# Altium PCB IND-SMD_3P-L27.9-W19.7-P10.43-LS27.9-BL-A.pcbdoc
Units mm, origin at the board's own origin, x right, y up, seen from the top; angles counter-clockwise.
Board outline 40.68 x 40.21 mm, 2 copper layers (Top Layer, Bottom Layer); 1 components, 0 nets, 3 pads, 0 vias.
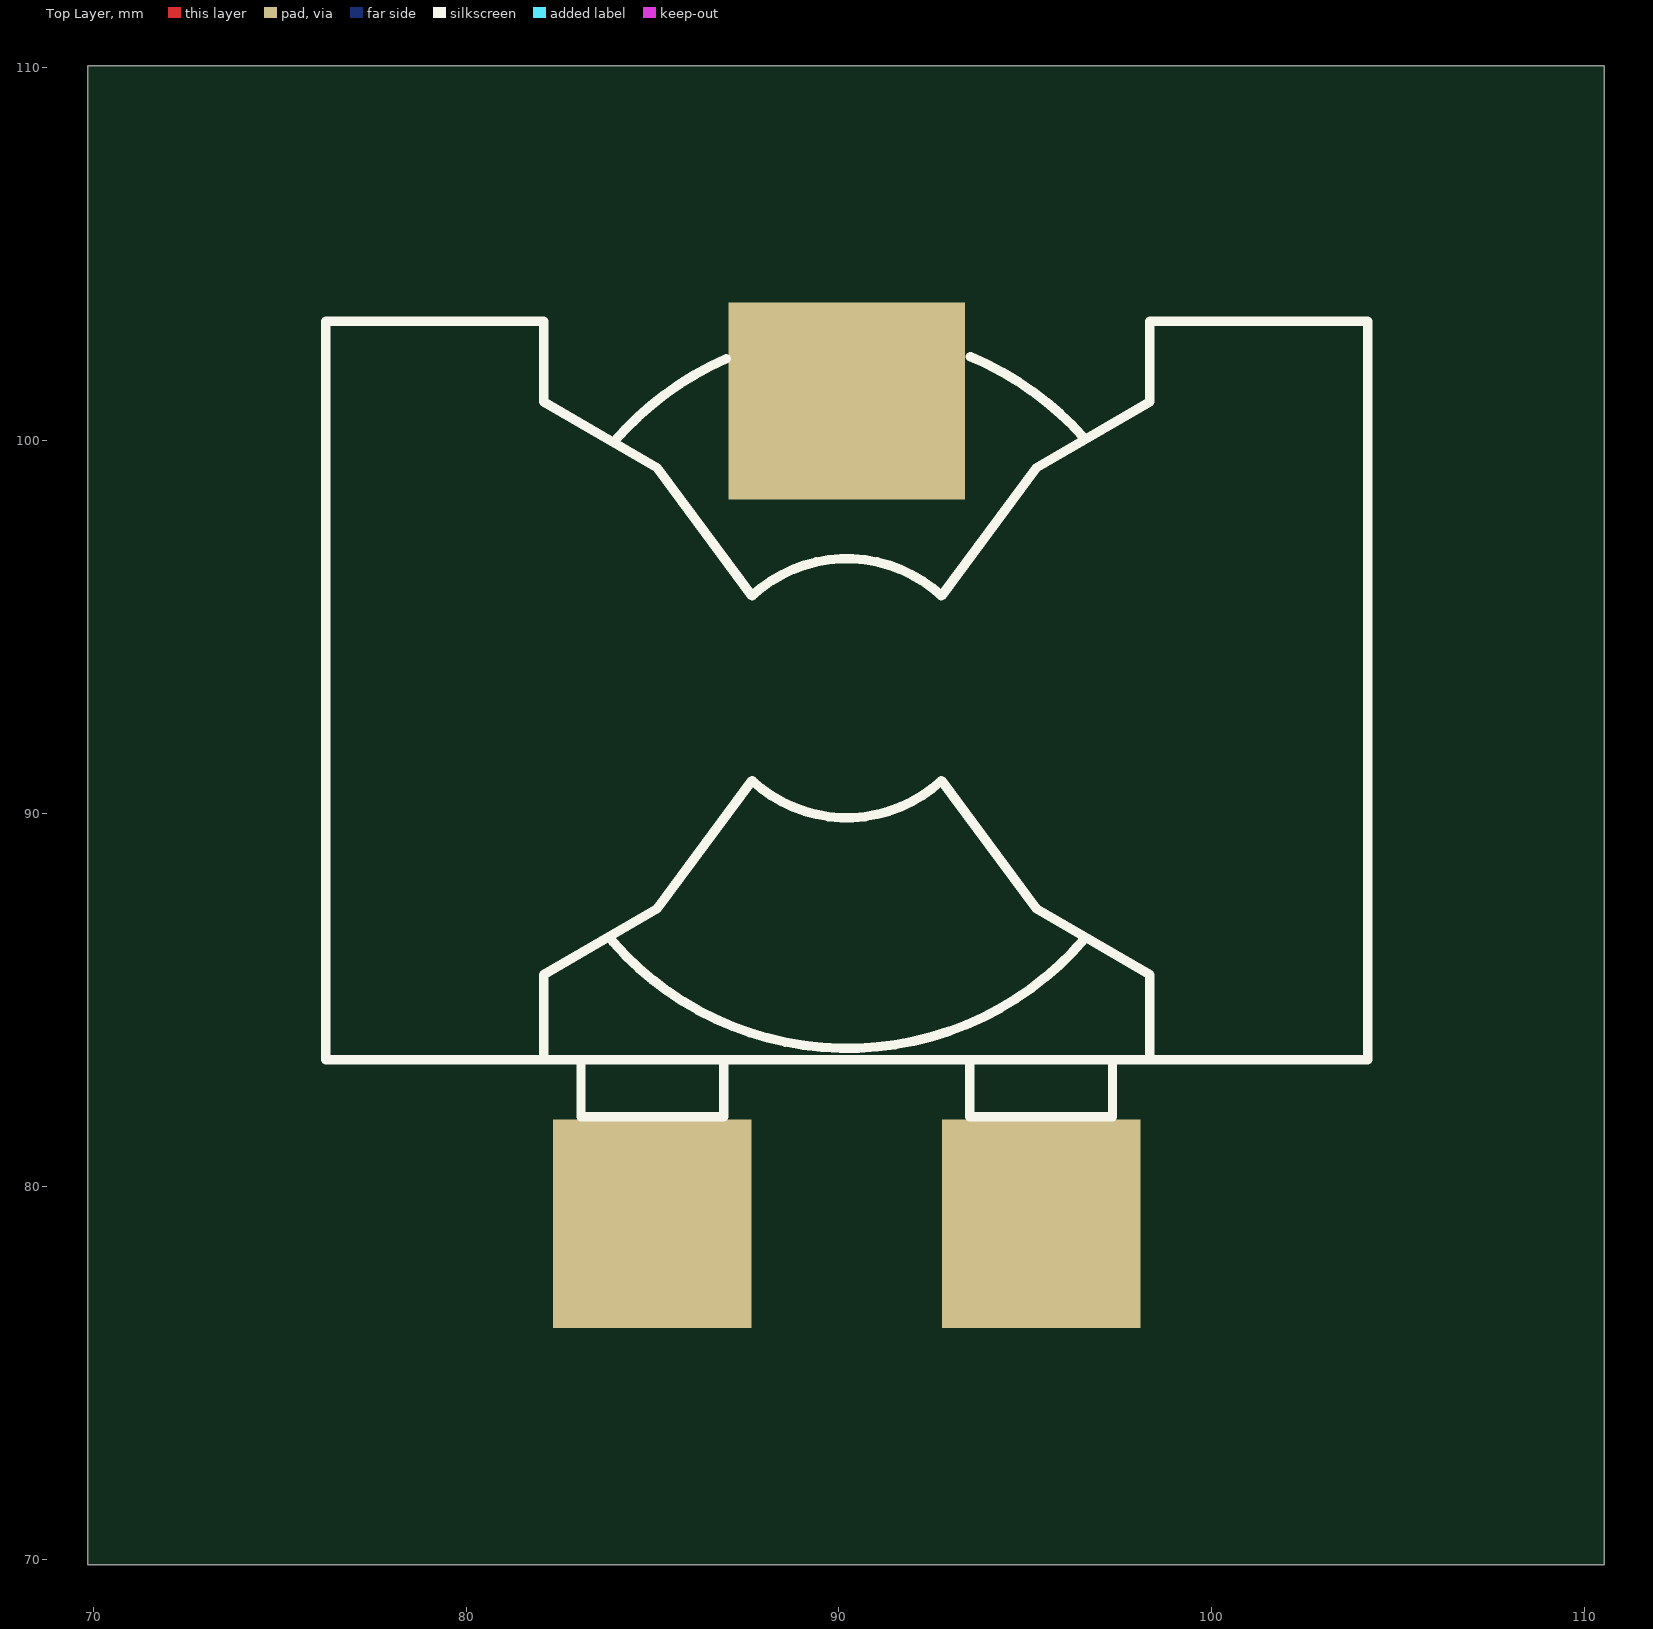
[diagram p0: Top Layer view]
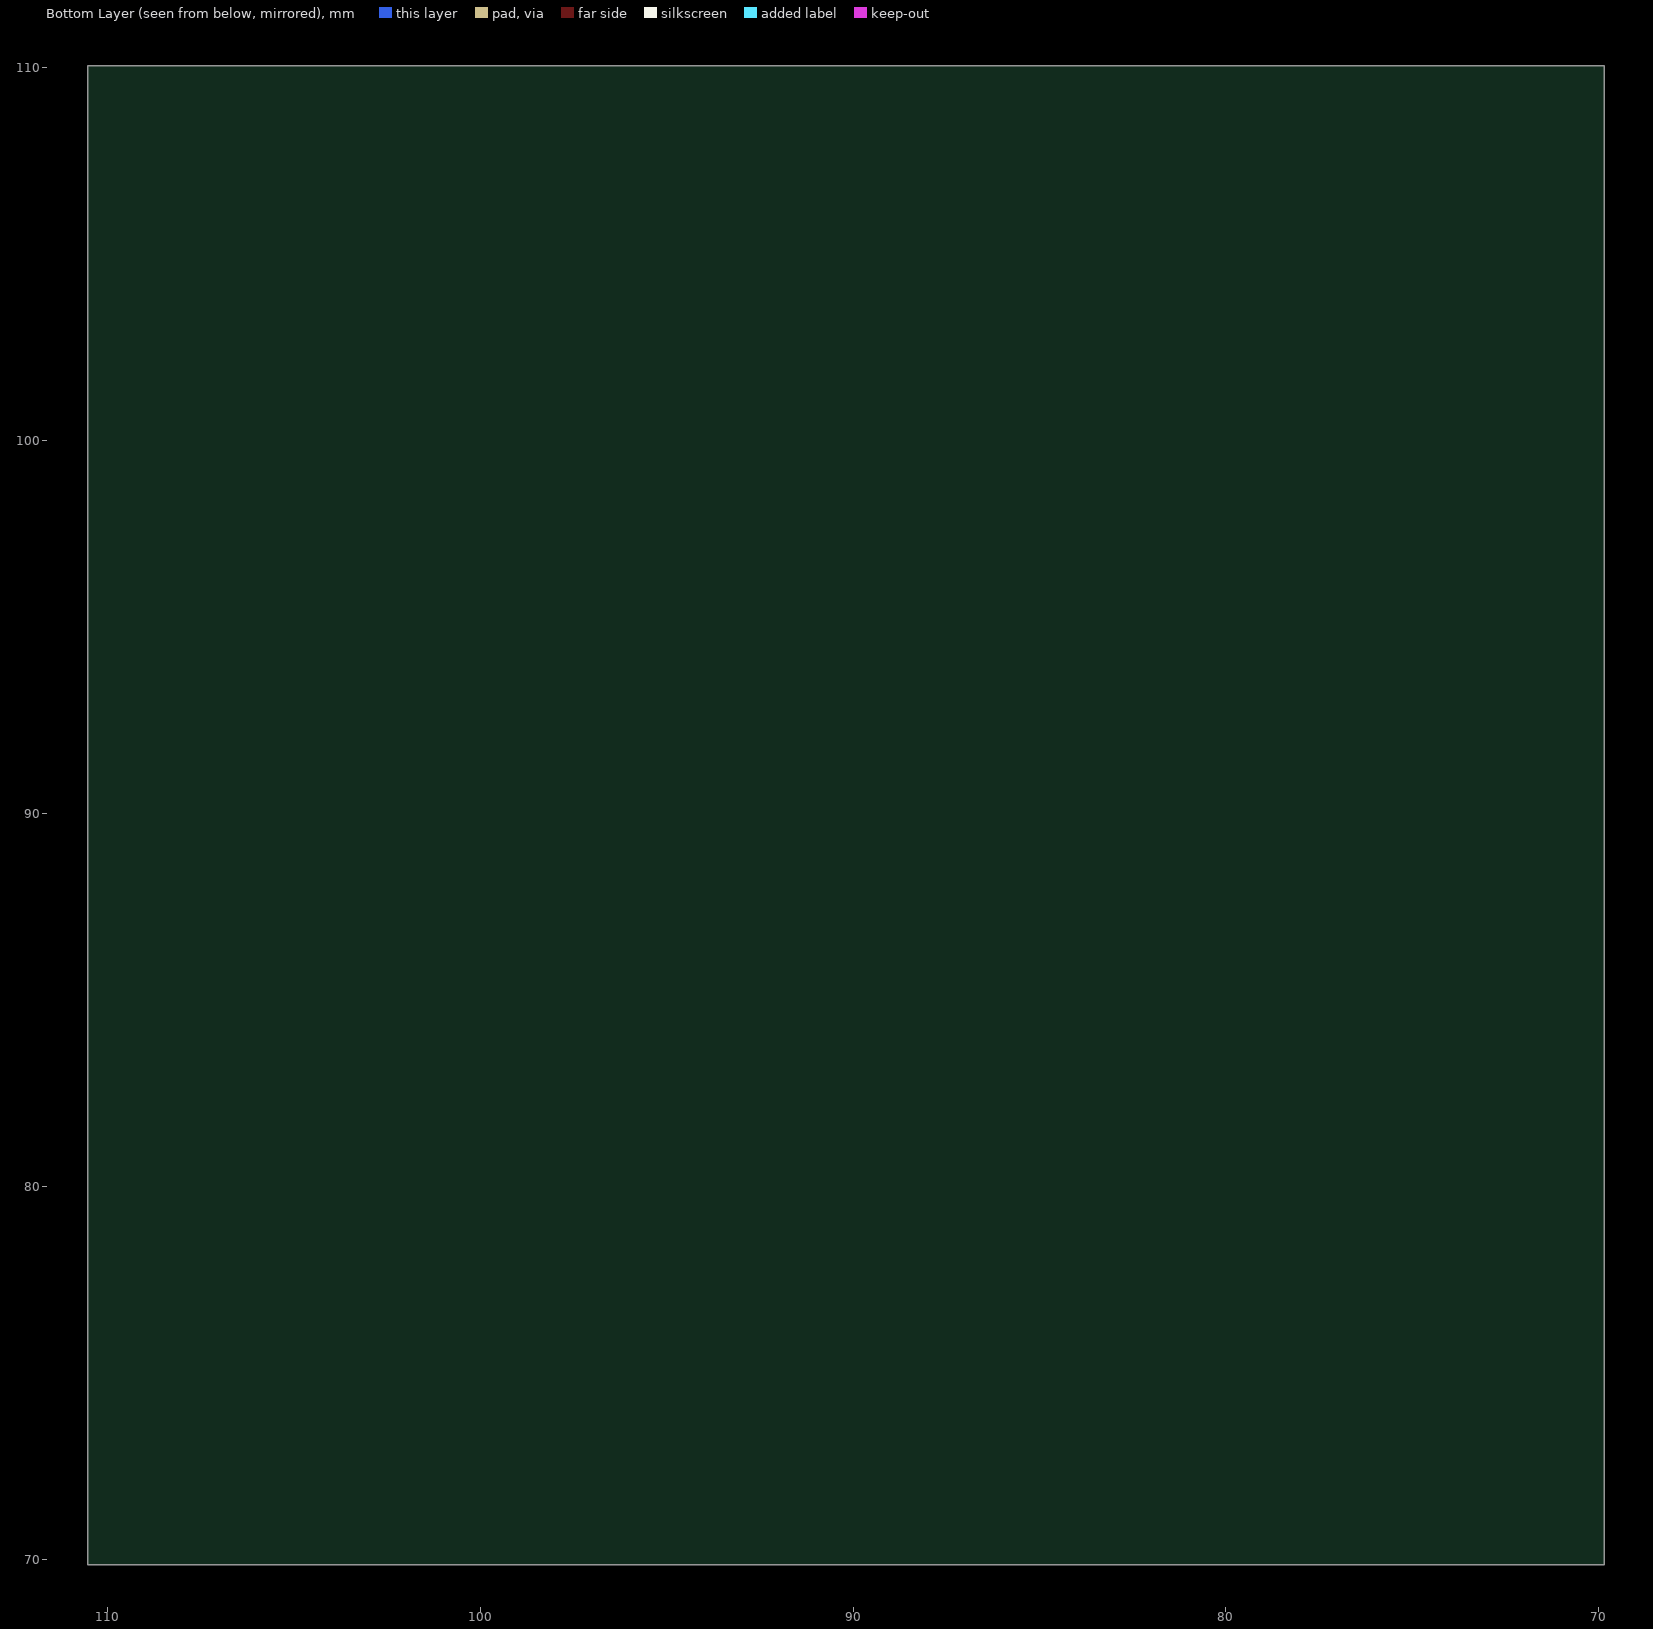
[diagram p1: Bottom Layer view, seen from below]

## Layer stack, top to bottom
Top Layer: signal copper (thickness not stored)
Dielectric: dielectric 0.32, FR-4, Dk 4.8
Bottom Layer: signal copper (thickness not stored)

## Board outline
110.53,69.85 69.85,69.85 69.85,110.06 110.53,110.06

## Components (designator, comment, footprint, x,y, rotation, side; value= is the part's Value field where it differs from the comment)
? "IND-SMD_3P-L27.9-W19.7-P10.43-LS27.9-BL-A" IND-SMD_3P-L27.9-W19.7-P10.43-LS27.9-BL-A 90.21,90.033 r0 top

## Footprints (in the part's own frame and the unit in brackets; to place one, negate y for a bottom-side part, rotate by r counter-clockwise, add the part's x,y. Pads: shape width x height; smd on the part's side, far side on the other; paste and mask are expansions set on the pad)
IND-SMD_3P-L27.9-W19.7-P10.43-LS27.9-BL-A [mm]
  rect 5.33x5.59 smd: 1(-5.215,-11.038) 2(5.215,-11.038)
  rect 6.35x5.28 smd: 3(0,11.038)
  silkscreen extent -13.97,-8.16 13.97,13.17

## Nets (pads, with @x,y where several pads share a name; then routed paths per layer and width w, separated by ;. In a path a pad name is that pad's centre, name@x,y a point inside that pad or via, vN(x,y) a via of type N, cw(c..) or ccw(c..) an arc to the next point about the centre after c; other vN are vias at no path point)
pads on no net: ?.1 ?.2 ?.3